# Altium PCB JacdacPowerUsbC4Port 50.PcbDoc (part 1 of 2)
Units mm, origin at the board's own origin, x right, y up, seen from the top; angles counter-clockwise.
Board outline 32.34 x 38.04 mm, 2 copper layers (Top Layer, Bottom Layer), stack 1.525 mm thick; 99 components, 54 nets, 301 pads, 83 vias.
Unrouted connection lines stored in the file: 7.
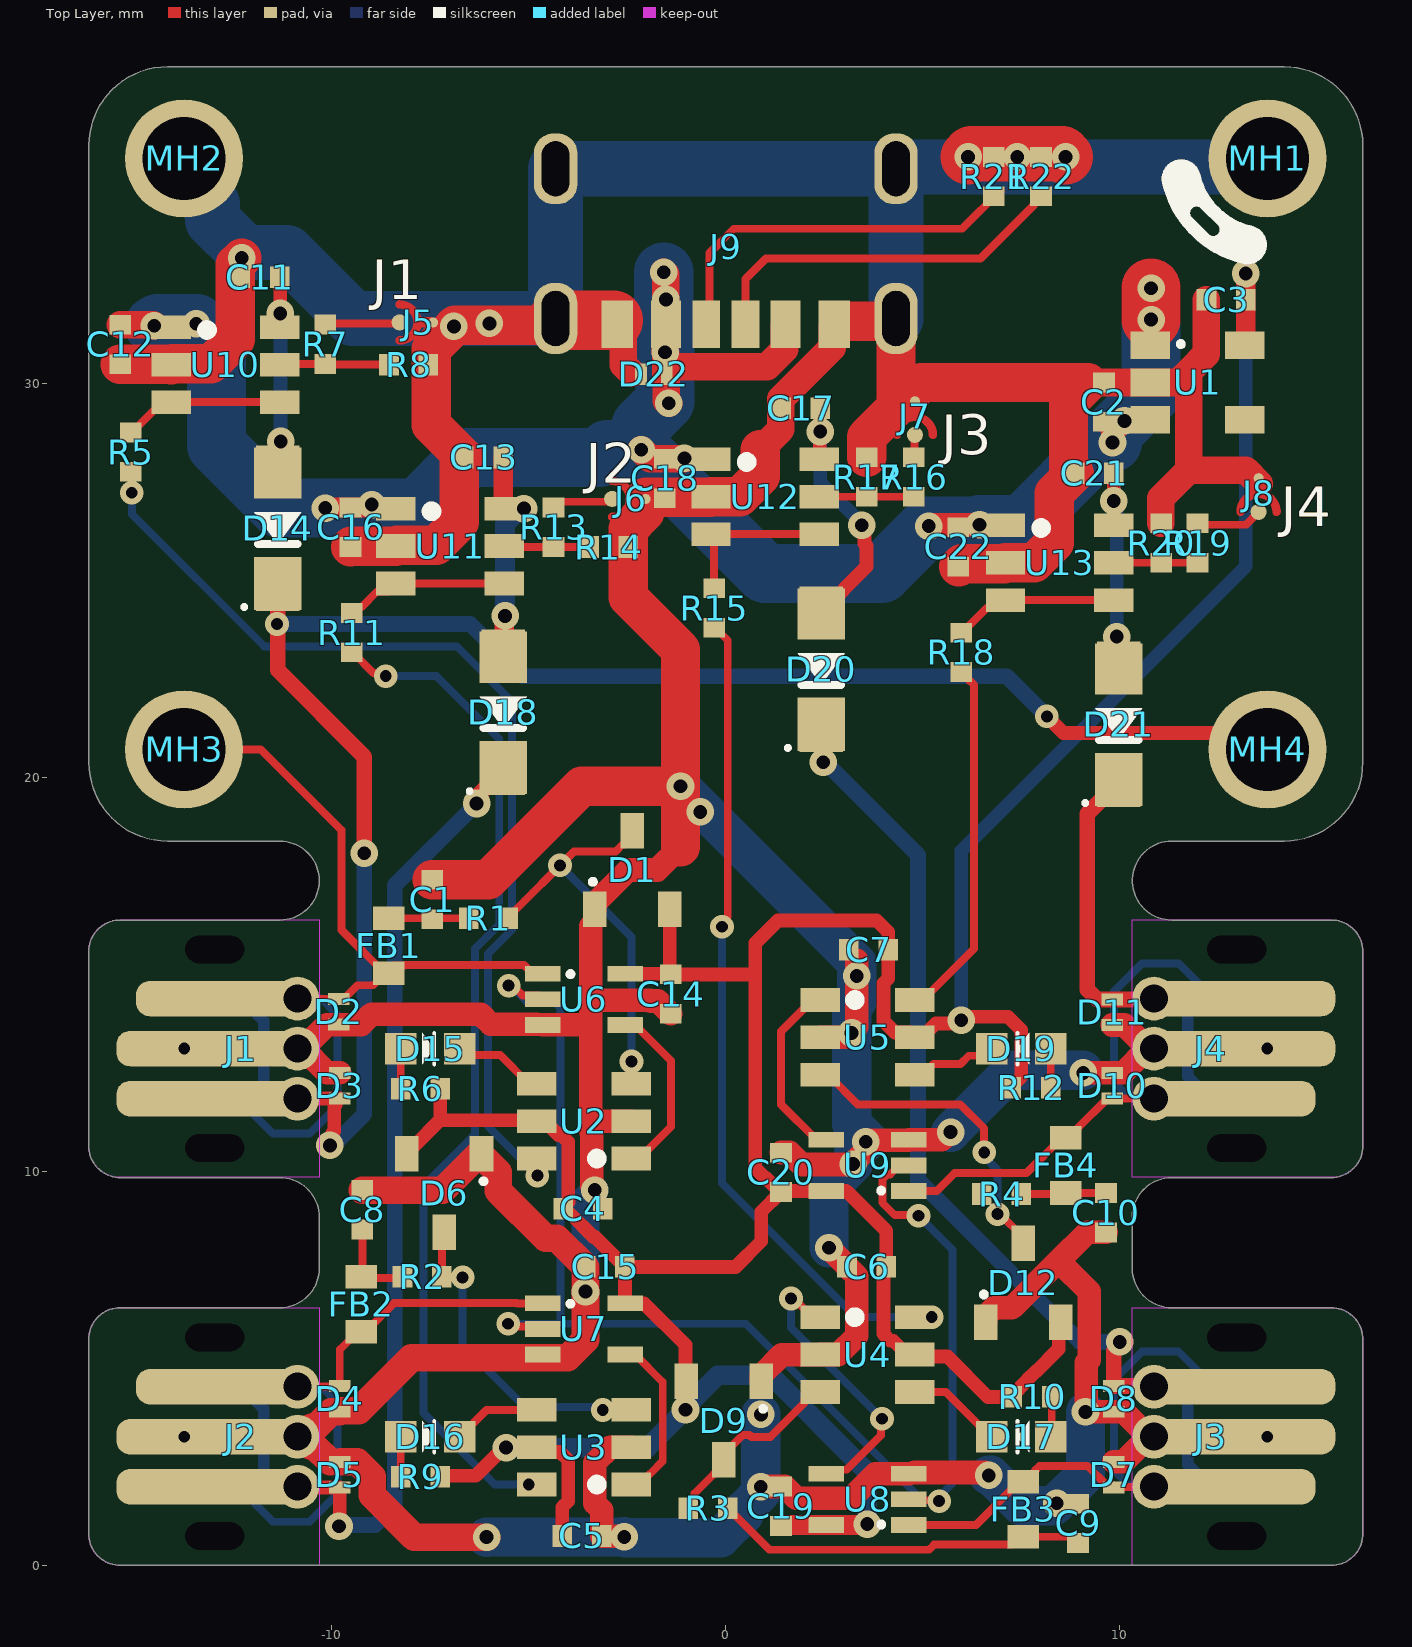
[diagram p0: Top Layer view]
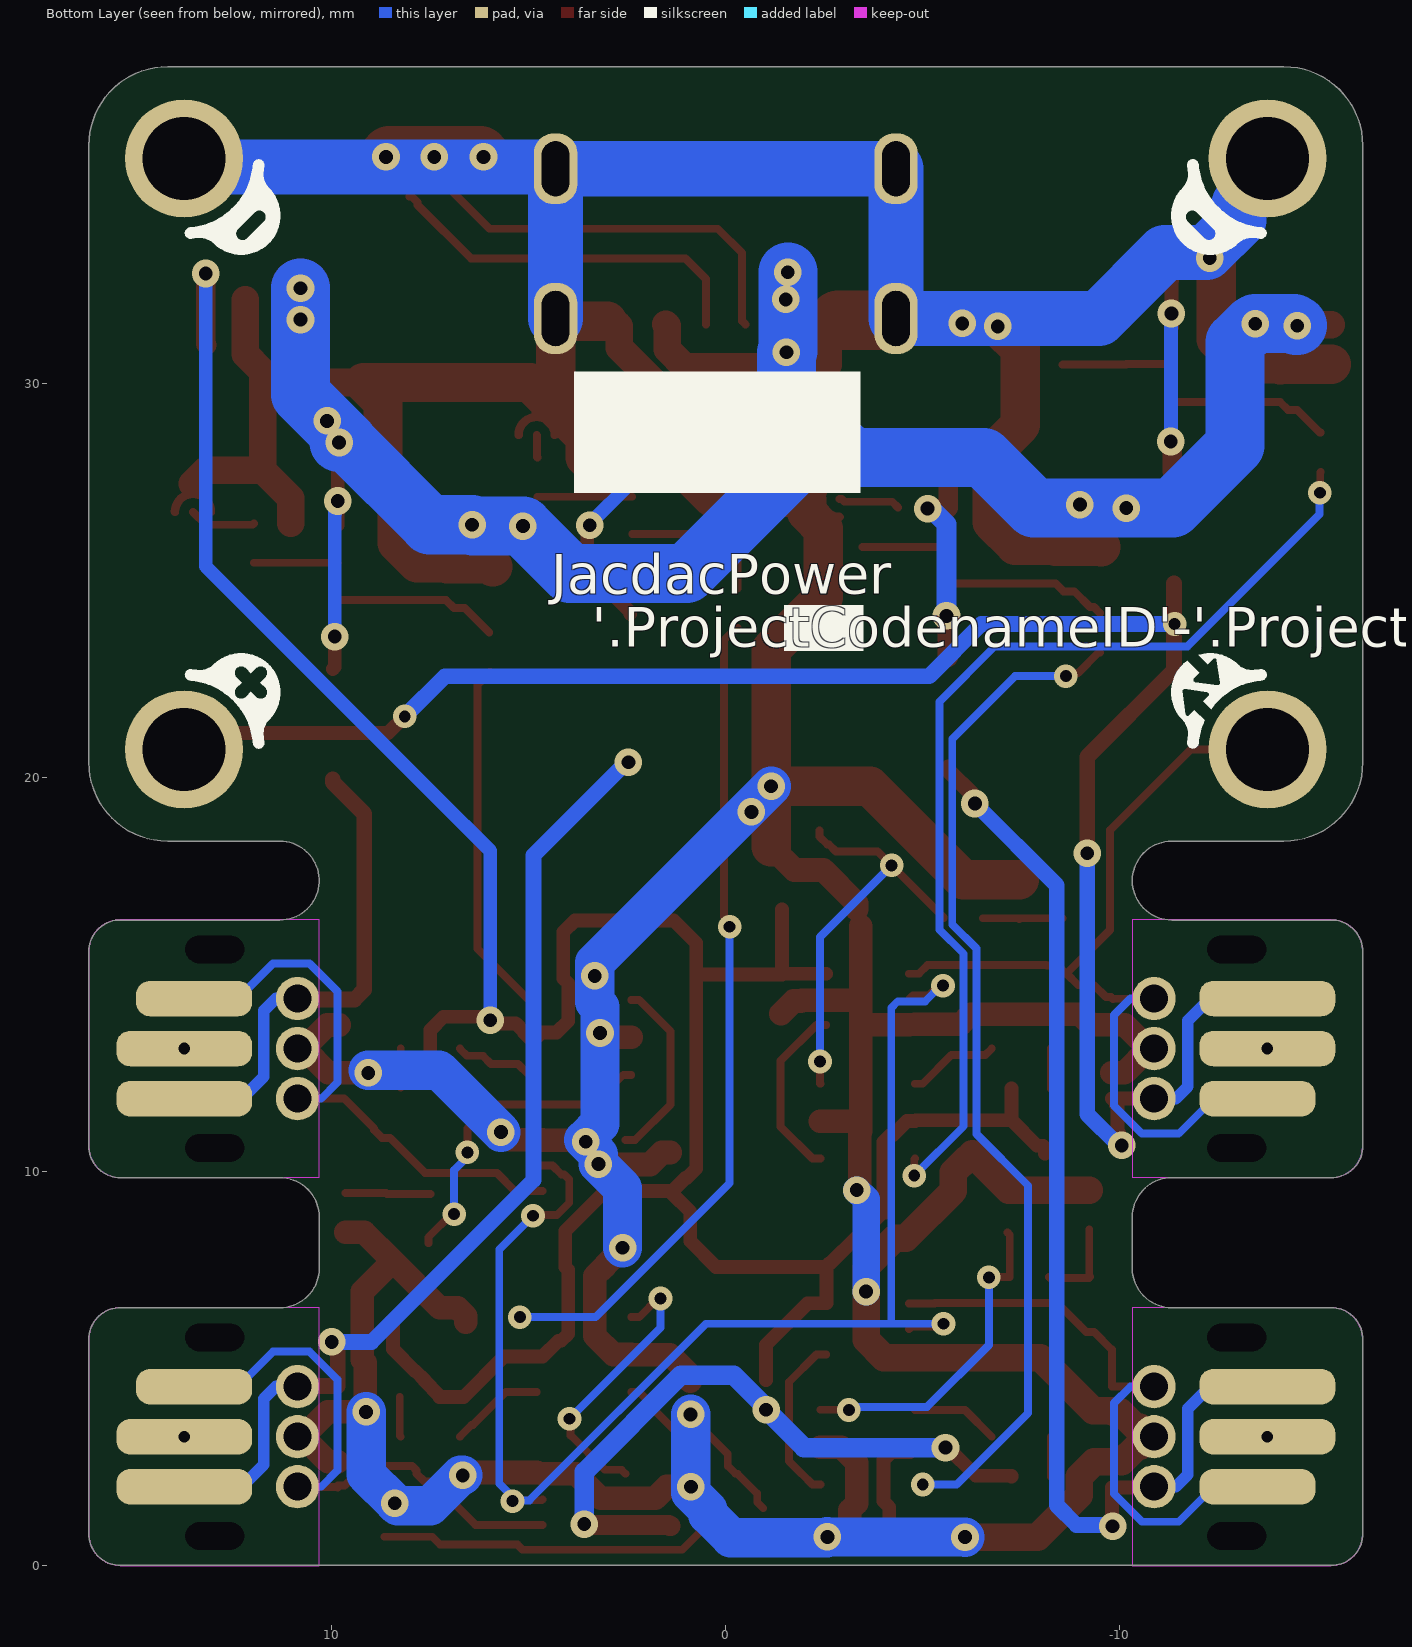
[diagram p1: Bottom Layer view, seen from below]

## Layer stack, top to bottom
Top Solder: solder mask 0.0102, Solder Resist, Dk 3.5
Top Layer: signal copper 0.0356
Dielectric 1: core 1.454, FR-4, Dk 4.2
Bottom Layer: signal copper 0.0356
Bottom Solder: solder mask 0.0102, Solder Resist, Dk 3.5

## Board outline
-16.17,0.8 ccw(c-15.371,0.799) -15.369,0 15.369,0 ccw(c15.371,0.799) 16.17,0.8 16.17,5.74 ccw(c15.371,5.741) 15.369,6.54 11.319,6.54 cw(c11.32,7.54) 10.319,7.541 10.319,8.84 cw(c11.319,8.84) 11.319,9.84 15.369,9.84 ccw(c15.371,10.639) 16.17,10.64 16.17,15.58 ccw(c15.371,15.581) 15.369,16.38 11.319,16.38 cw(c11.32,17.381) 11.321,18.381 14.17,18.381 ccw(c14.169,20.382) 16.17,20.381 16.17,36.04 ccw(c14.17,36.04) 14.17,38.04 -14.169,38.04 ccw(c-14.169,36.04) -16.168,36.04 -16.168,20.381 ccw(c-14.168,20.382) -14.169,18.381 -11.319,18.381 cw(c-11.32,17.38) -11.319,16.38 -15.369,16.38 ccw(c-15.371,15.581) -16.17,15.58 -16.17,10.64 ccw(c-15.371,10.639) -15.369,9.84 -11.319,9.84 cw(c-11.319,8.84) -10.319,8.84 -10.319,7.541 cw(c-11.32,7.54) -11.319,6.54 -15.369,6.54 ccw(c-15.371,5.741) -16.17,5.74

## Design rules (kind name [scope] priority, off if disabled: settings)
AssemblyTestPointUsage [All] p1: valid=2
BoardOutlineClearance [All] p1: gap=0.3 ignorepadtopadclearanceinfootprint=FALSE except(0: Arc-SplitContinuation Track-SplitContinuation SMDPad-SplitContinuation THPad-SplitContinuation Via-SplitContinuation Fill-SplitContinuation Poly-SplitContinuation Region-OutlineEdge Region-SplitContinuation Text-OutlineEdge Text-SplitContinuation; 0.2: Track-OutlineEdge Fill-CavityEdge Fill-CutoutEdge Fill-SplitBarrior Poly-CavityEdge Poly-CutoutEdge Poly-SplitBarrior Text-CavityEdge Text-CutoutEdge Text-SplitBarrior; 0.25: SMDPad-OutlineEdge)
Clearance [All] p1: gap=0.125 ignorepadtopadclearanceinfootprint=FALSE except(0: Arc-Hole Track-Hole SMDPad-Hole THPad-Hole Via-Hole Fill-Hole Poly-Hole Region-Hole Text-Hole)
ComponentClearance [All] p1: gap=0.1 collisioncheckmode=3 verticalgap=0.254 showdistances=FALSE
DiffPairsRouting [All] p1: maxlimit=2 minlimit=0.15 mostfreqgap=0.15 toplayer_minwidth=0.15 toplayer_maxwidth=2 toplayer_prefwidth=0.15 bottomlayer_minwidth=0.15 bottomlayer_maxwidth=2 bottomlayer_prefwidth=0.15 substack1={CB9D278B-8BF5-444A-AAF4-837A2A9DF42D} toplayer_{cb9d278b-8bf5-444a-aaf4-837a2a9df42d}_minwidth=0.381 toplayer_{cb9d278b-8bf5-444a-aaf4-837a2a9df42d}_maxwidth=0.381 toplayer_{cb9d278b-8bf5-444a-aaf4-837a2a9df42d}_prefwidth=0.381 bottomlayer_{cb9d278b-8bf5-444a-aaf4-837a2a9df42d}_minwidth=0.381 bottomlayer_{cb9d278b-8bf5-444a-aaf4-837a2a9df42d}_maxwidth=0.381 bottomlayer_{cb9d278b-8bf5-444a-aaf4-837a2a9df42d}_prefwidth=0.381 substack2={826B8647-A721-4255-895A-19F9591B9CD1} toplayer_{826b8647-a721-4255-895a-19f9591b9cd1}_minwidth=0.381 toplayer_{826b8647-a721-4255-895a-19f9591b9cd1}_maxwidth=0.381 toplayer_{826b8647-a721-4255-895a-19f9591b9cd1}_prefwidth=0.381 bottomlayer_{826b8647-a721-4255-895a-19f9591b9cd1}_minwidth=0.381 bottomlayer_{826b8647-a721-4255-895a-19f9591b9cd1}_maxwidth=0.381 bottomlayer_{826b8647-a721-4255-895a-19f9591b9cd1}_prefwidth=0.381 substack3={E64FCAF4-1BC8-437D-B1E0-0E5F2DC0F59E} toplayer_{e64fcaf4-1bc8-437d-b1e0-0e5f2dc0f59e}_minwidth=0.381 toplayer_{e64fcaf4-1bc8-437d-b1e0-0e5f2dc0f59e}_maxwidth=0.381 toplayer_{e64fcaf4-1bc8-437d-b1e0-0e5f2dc0f59e}_prefwidth=0.381 bottomlayer_{e64fcaf4-1bc8-437d-b1e0-0e5f2dc0f59e}_minwidth=0.381 bottomlayer_{e64fcaf4-1bc8-437d-b1e0-0e5f2dc0f59e}_maxwidth=0.381 bottomlayer_{e64fcaf4-1bc8-437d-b1e0-0e5f2dc0f59e}_prefwidth=0.381 substack4={E61CE66C-507C-4E1E-8E83-C905434AFC1C} toplayer_{e61ce66c-507c-4e1e-8e83-c905434afc1c}_minwidth=0.381 toplayer_{e61ce66c-507c-4e1e-8e83-c905434afc1c}_maxwidth=0.381 toplayer_{e61ce66c-507c-4e1e-8e83-c905434afc1c}_prefwidth=0.381 bottomlayer_{e61ce66c-507c-4e1e-8e83-c905434afc1c}_minwidth=0.381 bottomlayer_{e61ce66c-507c-4e1e-8e83-c905434afc1c}_maxwidth=0.381 bottomlayer_{e61ce66c-507c-4e1e-8e83-c905434afc1c}_prefwidth=0.381 maxuncoupledlength=25
FabricationTestPointUsage [All] p1: valid=2 allowmultiple=FALSE
HoleSize [All] p1: absolutevalues=TRUE maxlimit=2.54 minlimit=0.2 maxpercent=80.000 minpercent=20.000
MinimumSolderMaskSliver [All] p1: minsoldermaskwidth=0.005
PlaneClearance [All] p1: clearance=0.3
PlaneConnect [All] p1: planeconnectstyle=Relief reliefexpansion=0.5 reliefentries=4 reliefconductorwidth=0.2 reliefairgap=0.3
PolygonConnect "PolygonConnect GND" [isVIA] p1: connectstyle=Relief reliefconductorwidth=0.2 reliefentries=4 polygonreliefangle="90 Angle" airgapwidth=0.2
PolygonConnect [All] p2: connectstyle=Relief reliefconductorwidth=0.2 reliefentries=4 polygonreliefangle="90 Angle" airgapwidth=0.2
RoutingVias [All] p1: holewidth=0.3 width=0.6 viastyle="Through Hole" minholewidth=0.3 minwidth=0.6 maxholewidth=0.5 maxwidth=0.8
SilkToSilkClearance [All] p1: silktosilkclearance=0.001
SilkToSolderMaskClearance [IsPad] p1: minsilkscreentomaskgap=0.05 clearancetoexposedcopper=TRUE
SolderMaskExpansion [All] p1: expansion=0.075 istentingtop=FALSE
Width [All] p1: maxlimit=2 minlimit=0.15 preferedwidth=0.15 substack1={CB9D278B-8BF5-444A-AAF4-837A2A9DF42D} substack2={826B8647-A721-4255-895A-19F9591B9CD1} substack3={E64FCAF4-1BC8-437D-B1E0-0E5F2DC0F59E} substack4={E61CE66C-507C-4E1E-8E83-C905434AFC1C} minimp=50.000000 maximp=50.000000 favimp=50.000000
20 further rules are at their usual default settings.

## Components (designator, comment, footprint, x,y, rotation, side; value= is the part's Value field where it differs from the comment)
C1 "CL05C330JB5NNNC" "C0402_0.55MM - without outline" -7.45,16.9 r270 top
C2 "CL05A105KP5NNNC" "C0402_0.55MM - without outline" 9.6,29.525 r270 top
C3 "CL05A105KP5NNNC" "C0402_0.55MM - without outline" 12.7,32.125 r0 top
C4 "CL05A105KP5NNNC" "C0402_0.55MM - without outline" -3.625,9.05 r180 top
C5 "CL05A105KP5NNNC" "C0402_0.55MM - without outline" -3.65,0.745 r180 top
C6 "CL05A105KP5NNNC" "C0402_0.55MM - without outline" 3.575,7.575 r0 top
C7 "CL05A105KP5NNNC" "C0402_0.55MM - without outline" 3.625,15.625 r0 top
C8 "CL05C330JB5NNNC" "C0402_0.55MM - without outline" -9.225,9.025 r270 top
C9 "CL05C330JB5NNNC" "C0402_0.55MM - without outline" 8.942,1.065 r270 top
C10 "CL05C330JB5NNNC" "C0402_0.55MM - without outline" 9.65,8.95 r90 top
C11 "CL05A475MP5NRNC" "R0402 - WITHOUT OUTLINE" -11.825,32.7 r0 top
C12 "CL05A475MP5NRNC" "R0402 - WITHOUT OUTLINE" -15.371,30.991 r90 top
C13 "CL05A475MP5NRNC" "R0402 - WITHOUT OUTLINE" -6.15,28.123 r0 top
C14 "CL05A105KP5NNNC" "C0402_0.55MM - without outline" -1.4,14.5 r90 top
C15 "CL05A105KP5NNNC" "C0402_0.55MM - without outline" -3.062,7.575 r0 top
C16 "CL05A475MP5NRNC" "R0402 - WITHOUT OUTLINE" -9.525,26.35 r90 top
C17 "CL05A475MP5NRNC" "R0402 - WITHOUT OUTLINE" 1.9,29.375 r0 top
C18 "CL05A475MP5NRNC" "R0402 - WITHOUT OUTLINE" -1.55,27.59 r90 top
C19 "CL05A105KP5NNNC" "C0402_0.55MM - without outline" 1.4,1.5 r270 top
C20 "CL05A105KP5NNNC" "C0402_0.55MM - without outline" 1.4,9.975 r270 top
C21 "CL05A475MP5NRNC" "R0402 - WITHOUT OUTLINE" 9.35,27.725 r0 top
C22 "CL05A475MP5NRNC" "R0402 - WITHOUT OUTLINE" 5.9,25.85 r90 top
D1 "BAT54S" "NXP-BAT54S-TO-236AB - without outline" -2.375,17.65 r90 top
D2 "RCLAMP0521P-N" "TVS 0402 - without outline" -9.825,14.05 r270 top
D3 "RCLAMP0521P-N" "TVS 0402 - without outline" -9.8,12.175 r90 top
D4 "RCLAMP0521P-N" "TVS 0402 - without outline" -9.8,4.225 r270 top
D5 "RCLAMP0521P-N" "TVS 0402 - without outline" -9.8,2.3 r90 top
D6 "BAT54S" "NXP-BAT54S-TO-236AB - without outline" -7.15,9.45 r270 top
D7 "RCLAMP0521P-N" "TVS 0402 - without outline" 9.85,2.3 r90 top
D8 "RCLAMP0521P-N" "TVS 0402 - without outline" 9.85,4.225 r270 top
D9 "BAT54S" "NXP-BAT54S-TO-236AB - without outline" -0.05,3.675 r270 top
D10 "RCLAMP0521P-N" "TVS 0402 - without outline" 9.812,12.175 r90 top
D11 "RCLAMP0521P-N" "TVS 0402 - without outline" 9.812,14.04 r270 top
D12 "BAT54S" "NXP-BAT54S-TO-236AB - without outline" 7.55,7.175 r90 top
D14 "RB161MM-20TR" SOD-123F -11.375,26.325 r90 top
D14 "PMEG2010ER,115" SOD-123W -11.375,26.325 r90 top
D15 "Everlight Elec'''" "0603 ORANGE" -7.5,13.116 r180 top
D16 "Everlight Elec'''" "0603 Orange" -7.5,3.265 r180 top
D17 "Everlight Elec'''" "0603 Orange" 7.5,3.265 r0 top
D18 "RB161MM-20TR" SOD-123F -5.65,21.65 r90 top
D18 "PMEG2010ER,115" SOD-123W -5.65,21.65 r90 top
D19 "Everlight Elec'''" "0603 Orange" 7.5,13.116 r0 top
D20 "RB161MM-20TR" SOD-123F 2.425,22.75 r90 top
D20 "PMEG2010ER,115" SOD-123W 2.425,22.75 r90 top
D21 "RB161MM-20TR" SOD-123F 9.975,21.35 r90 top
D21 "PMEG2010ER,115" SOD-123W 9.975,21.35 r90 top
D22 "RCLAMP0521P-N" "TVS 0402 - without outline" -1.825,30.234 r180 top
FB1 "TDK MPZ1608S102ATA00" "TDK MPZ1608 0.8mm - without outline" -8.55,15.725 r90 top
FB2 "TDK MPZ1608S102ATA00" "TDK MPZ1608 0.8mm - without outline" -9.25,6.625 r90 top
FB3 "TDK MPZ1608S102ATA00" "TDK MPZ1608 0.8mm - without outline" 7.55,1.425 r270 top
FB4 "TDK MPZ1608S102ATA00" "TDK MPZ1608 0.8mm - without outline" 8.625,10.15 r270 top
J1 "3 pin JACDAC edge connector" JACDAC_EDGE_CONNECTOR_0.15mm_T&G -10.871,13.116 r90 top locked
J2 "3 pin JACDAC edge connector" JACDAC_EDGE_CONNECTOR_0.15mm_T&G -10.871,3.265 r90 top locked
J3 "3 pin JACDAC edge connector" JACDAC_EDGE_CONNECTOR_0.15mm_T&G 10.871,3.265 r270 top locked
J4 "3 pin JACDAC edge connector" JACDAC_EDGE_CONNECTOR_0.15mm_T&G 10.871,13.116 r270 top locked
J5 "OpenSolderBlob" SolderBlobA -7.9,31.55 r180 top
J6 "OpenSolderBlob" SolderBlobA -2.506,27.069 r180 top
J7 "OpenSolderBlob" SolderBlobA 4.8,29.075 r270 top
J8 "OpenSolderBlob" SolderBlobA 13.525,27.122 r270 top
J9 "TYPE-C-31-M-17" TYPE-C-31-M-17 0,31.5 r180 top
MH1 "MH_5.0MMK_3.0MMC_2.1MMD_PTH" MH_5.0MMK_3.0MMC_2.1MMD_PTH 13.75,35.711 r0 top locked
MH2 "MH_5.0MMK_3.0MMC_2.1MMD_PTH" MH_5.0MMK_3.0MMC_2.1MMD_PTH -13.75,35.711 r180 top locked
MH3 "MH_5.0MMK_3.0MMC_2.1MMD_PTH" MH_5.0MMK_3.0MMC_2.1MMD_PTH -13.75,20.711 r180 top locked
MH4 "MH_5.0MMK_3.0MMC_2.1MMD_PTH" MH_5.0MMK_3.0MMC_2.1MMD_PTH 13.75,20.711 r0 top locked
R1 "RC0402FR-07220RL" "R0402 - WITHOUT OUTLINE" -6.025,16.425 r180 top
R2 "RC0402FR-07220RL" "R0402 - WITHOUT OUTLINE" -7.708,7.321 r180 top
R3 "RC0402FR-07220RL" "R0402 - WITHOUT OUTLINE" -0.45,1.45 r0 top
R4 "RC0402FR-07220RL" "R0402 - WITHOUT OUTLINE" 7,9.425 r0 top
R5 "RC0402FR-07220RL" "R0402 - WITHOUT OUTLINE" -15.102,28.255 r270 top
R6 "RC0402FR-071KL" "R0402 - WITHOUT OUTLINE" -7.75,12.1 r0 top
R7 "RC0402FR-0760K4L" "R0402 - WITHOUT OUTLINE" -10.168,30.994 r270 top
R8 "RC0402FR-0760K4L" "R0402 - WITHOUT OUTLINE" -8.05,30.475 r180 top
R9 "RC0402FR-071KL" "R0402 - WITHOUT OUTLINE" -7.75,2.25 r0 top
R10 "RC0402FR-071KL" "R0402 - WITHOUT OUTLINE" 7.775,4.275 r180 top
R11 "RC0402FR-07220RL" "R0402 - WITHOUT OUTLINE" -9.495,23.675 r270 top
R12 "RC0402FR-071KL" "R0402 - WITHOUT OUTLINE" 7.75,12.125 r180 top
R13 "RC0402FR-0760K4L" "R0402 - WITHOUT OUTLINE" -4.373,26.35 r270 top
R14 "RC0402FR-0760K4L" "R0402 - WITHOUT OUTLINE" -2.974,25.848 r180 top
R15 "RC0402FR-07220RL" "R0402 - WITHOUT OUTLINE" -0.295,24.3 r270 top
R16 "RC0402FR-0760K4L" "R0402 - WITHOUT OUTLINE" 4.775,27.625 r270 top
R17 "RC0402FR-0760K4L" "R0402 - WITHOUT OUTLINE" 3.575,27.625 r270 top
R18 "RC0402FR-07220RL" "R0402 - WITHOUT OUTLINE" 5.975,23.175 r270 top
R19 "RC0402FR-0760K4L" "R0402 - WITHOUT OUTLINE" 11.975,25.95 r270 top
R20 "RC0402FR-0760K4L" "R0402 - WITHOUT OUTLINE" 11.05,25.95 r270 top
R21 "RC0402JR-075K1L" "R0402 - WITHOUT OUTLINE" 6.8,35.25 r90 top
R22 "RC0402JR-075K1L" "R0402 - WITHOUT OUTLINE" 8,35.25 r90 top
U1 "LDO 3.3V/300 mA" "ON_SEMI-SOT23-5 - without outline" 11.975,30.025 r0 top
U2 "PMS150C" SOT23-6 -3.6,11.275 r180 top
U3 "PMS150C" SOT23-6 -3.6,3 r180 top
U4 "PMS150C" SOT23-6 3.6,5.35 r0 top
U5 "PMS150C" SOT23-6 3.6,13.4 r0 top
U6 "74LVC1G66GW,125" TSSOP-5/SOT353-1 -3.6,14.367 r0 top
U7 "74LVC1G66GW,125" TSSOP-5/SOT353-1 -3.6,6 r0 top
U8 "74LVC1G66GW,125" TSSOP-5/SOT353-1 3.6,1.675 r180 top
U9 "74LVC1G66GW,125" TSSOP-5/SOT353-1 3.6,10.15 r180 top
U10 "TPS2553DBVR" "TI-TPS2553 - without_outline" -12.7,30.475 r0 top
U11 "TPS2553DBVR" "TI-TPS2553 - without_outline" -7,25.873 r0 top
U12 "TPS2553DBVR" "TI-TPS2553 - without_outline" 1,27.125 r0 top
U13 "TPS2553DBVR" "TI-TPS2553 - without_outline" 8.475,25.45 r0 top

## Footprints (in the part's own frame and the unit in brackets; to place one, negate y for a bottom-side part, rotate by r counter-clockwise, add the part's x,y. Pads: shape width x height; smd on the part's side, far side on the other; paste and mask are expansions set on the pad)
"0603 ORANGE" [mm]
  rect 0.8x0.8 smd paste-0.05: 1(-0.75,0) 2(0.75,0)
  silkscreen extent -0.1,-0.4 0.2,0.4, body extent -0.79,-0.4 0.81,0.4, height 0.4
"0603 Orange" [mm]
  rect 0.8x0.8 smd paste-0.05: 1(-0.75,0) 2(0.75,0)
  silkscreen extent -0.1,-0.4 0.2,0.4, body extent -0.79,-0.4 0.81,0.4, height 0.4
"C0402_0.55MM - without outline" [mm]
  rect 0.5x0.55 smd: 1(-0.5,0) 2(0.5,0)
  body extent -0.5,-0.25 0.5,0.25, height 0.55
JACDAC_EDGE_CONNECTOR_0.15mm_T&G [mm] "JacDac 3 pin connector with traces for 0.15mm T&G"
  rrect78% 0.9x2.95 smd far side paste-1 mask+0: 1(-1.27,2.625)
  rrect78% 0.9x4.3 smd paste-1 mask+0: 1(1.27,1.95)
  round 1.11 / inner round 0.71 / far side round 1.1 hole 0.71 paste-0.254 mask+0: 1(1.27,0) 2(0,0) 3(-1.27,0)
  rrect78% 0.9x3.45 smd far side paste-1 mask+0: 2(0,2.875) 3(1.27,2.875)
  rrect78% 0.9x4.8 smd paste-1 mask+0: 2(0,2.2) 3(-1.27,2.2)
  round 0 hole 0.7 slot 1.5 at 90 deg unplated: ""(-2.52,2.1) ""(2.52,2.1)
  Top Layer keep-out region: -3.27,-0.55 -3.27,4.5 -3.209,4.806 -3.036,5.066 -2.776,5.239 -2.47,5.3 -2.47,5.3 2.47,5.3 2.776,5.239 3.036,5.066 3.209,4.806 3.27,4.5 3.27,4.5 3.27,-0.55
  Bottom Layer lines w0.2: -1.27,2.625 -1.27,1.513 -2.159,0.624 -2.159,-0.305 -1.448,-1.016 0.254,-1.016 0.854,-1.016 1.27,-0.6 1.27,0
  Bottom Layer lines w0.3: 1.27,2.875 1.27,1.412 0.713,0.855 -0.965,0.855 -1.27,0.55 -1.27,0
  Bottom Layer keep-out region: -3.27,-0.55 -3.27,4.5 -3.209,4.806 -3.036,5.066 -2.776,5.239 -2.47,5.3 -2.47,5.3 2.47,5.3 2.776,5.239 3.036,5.066 3.209,4.806 3.27,4.5 3.27,4.5 3.27,-0.55
MH_5.0MMK_3.0MMC_2.1MMD_PTH [mm] "Mounting Hole 5.0mm clearance, 3.1 annualar ring and 2.1mm PTH"
  round 3 hole 2.1 mask+0.05: 1(0,0)
"NXP-BAT54S-TO-236AB - without outline" [mm] "SOT23, 3-Leads, Body 2.90x2.30mm, Pitch 0.95mm, IPC Medium Density"
  rect 0.9x0.6 smd: 1(-1,0.95) 2(-1,-0.95) 3(1,0)
  silkscreen extent -0.35,0.95 -0.25,1.05, body extent -1.32,-1.5 1.32,1.5, height 1.12
"ON_SEMI-SOT23-5 - without outline" [mm]
  rect 1x0.7 smd: 1(-1.2,0.95) 2(-1.2,0) 3(-1.2,-0.95) 4(1.2,-0.95) 5(1.2,0.95)
  silkscreen extent -0.47,0.93 -0.38,1.02, body extent -1.5,-1.57 1.5,1.58, height 1.1
"R0402 - WITHOUT OUTLINE" [mm]
  rect 0.5x0.55 smd: 1(-0.5,0) 2(0.5,0)
  body extent -0.5,-0.25 0.5,0.25, height 0.35
SOD-123F [mm] "SODFL, 2-Leads, Body 1.65x3.60mm, IPC Medium Density"
  rect 1.35x1.1 smd: 1(-1.425,0) 2(1.425,0)
  silkscreen extent -2.05,0.8 -1.95,0.9, body extent -1.73,-0.82 1.72,0.82, height 0.95
SOD-123W [mm]
  rect 1.35x1.2 smd: 1(-1.4,0)
  rect 1.3x1.2 smd: 2(1.4,0)
  silkscreen extent -0.4,-0.6 0.4,0.6, body extent -1.85,-0.95 1.85,0.95, height 1.09
SolderBlobA [mil] "open solder blob, 'ball and socket' style"
  round 16 smd paste-10: 1(15,0)
  round 1 smd paste-10 mask-1: 2(-22.01,0) 2(-18.47,-3.55) 2(-18.47,3.55)
  oval 10x10.01 smd paste-10 mask-2: 2(-18.65,0.03)
  Top Layer region: -17,-3.84 -18.47,-3.55 -19.72,-2.72 -20.55,-1.47 -20.84,0 -20.84,0 -20.55,1.47 -19.72,2.72 -18.47,3.55 -17,3.84 -17,3.84 -15.53,3.55 -14.28,2.72 -13.45,1.47 -13.16,0 -13.16,0 -13.45,-1.47 -14.28,-2.72 -15.53,-3.55 -17,-3.84
  Top Layer region: -17,-5.01 -19.18,-4.52 -20.92,-3.13 -21.89,-1.12 -21.89,1.12 -20.92,3.13 -19.18,4.52 -17,5.01 -17,5.01 -6.44,5.01 -2.16,13.79 5.48,19.85 15,22.01 15,22.01 16.54,21.71 17.84,20.84 18.71,19.54 19.02,18 19.02,18 18.71,16.46 17.84,15.16 16.54,14.29 15,13.99 15,13.99 9.65,12.92 5.11,9.89 2.08,5.35 1.02,0 1.02,0 2.08,-5.35 5.11,-9.89 9.65,-12.92 15,-13.99 15,-13.99 16.54,-14.29 17.84,-15.16 18.71,-16.46 19.02,-18 19.02,-18 18.71,-19.54 17.84,-20.84 16.54,-21.71 15,-22.01 15,-22.01 5.48,-19.85 -2.16,-13.79 -6.44,-5.02 -6.44,-5.01
SOT23-6 [mm] "SOT23, 6-Leads, Body 2.90x2.45mm, Pitch 0.95mm, IPC Medium Density"
  rect 1x0.6 smd: 1(-1.2,0.95) 2(-1.2,0) 3(-1.2,-0.95) 4(1.2,-0.95) 5(1.2,0) 6(1.2,0.95)
  silkscreen extent -0.43,0.85 -0.23,1.05, body extent -1.4,-1.45 1.4,1.45, height 1.45
"TDK MPZ1608 0.8mm - without outline" [mm]
  rect 0.6x0.8 smd paste-0.1: 1(-0.7,0) 2(0.7,0)
  body extent -0.8,-0.4 0.8,0.4, height 0.8
"TI-TPS2553 - without_outline" [mm] "SOT23, 6-Leads, Body 2.90x2.80mm, Pitch 0.95mm, IPC Medium Density"
  rect 1x0.6 smd: 1(-1.375,0.95) 2(-1.375,0) 3(-1.375,-0.95) 4(1.375,-0.95) 5(1.375,0) 6(1.375,0.95)
  silkscreen extent -0.59,0.76 -0.34,1.01, body extent -1.52,-1.52 1.53,1.53, height 1.1
TSSOP-5/SOT353-1 [mm] "plastic thin shrink small outline package; 5 leads; body width 1.25 mm"
  rect 0.9x0.4 smd: 1(-1.05,0.65) 2(-1.05,0) 3(-1.05,-0.65) 4(1.05,-0.65) 5(1.05,0.65)
  silkscreen extent -0.39,0.59 -0.29,0.69, body extent -1.05,-1.05 1.05,1.05, height 0.93
"TVS 0402 - without outline" [mm] "TVS 0402 RoHS"
  rect 0.3x0.55 smd mask+0.05: 1(-0.325,0) 2(0.325,0)
  body extent -0.5,-0.3 0.5,0.3, height 0.5
TYPE-C-31-M-17 [mm] "USB - Type C Female 6 USB Connectors RoHS"
  rrect90% 1.1x1.8 hole 0.7 slot 1.4 at 90 deg: 1(-4.32,-0.15) 2(-4.32,-3.95) 3(4.32,-3.95) 4(4.32,-0.15)
  rect 0.7x1.2 smd: A5(-0.5,0) B5(0.5,0)
  rect 0.76x1.2 smd: A9(1.52,0) B9(-1.52,0)
  rect 0.8x1.2 smd: A12(2.75,0) B12(-2.75,0)
  body extent -4.45,-6.8 4.5,0.6, height 3.16

## Part data
C1 C8 C9 C10: "CAP CER 33PF 50V C0G/NP0 0402", Capacitance=33pF, Case Code (Imperial)=0402, Case Code (Metric)=1005, Dielectric=C0G, Manufacturer=Samsung, Max Operating Temperature=125°C, Min Operating Temperature=-55°C, Package Quantity=1, Supplier Part Number 1=1276-1272-1-ND, Temperature Coefficient=300ppm/°C, Tolerance=5%, Voltage=50V, Case/Package=0402, Category="Ceramic Capacitors", ComponentLink1Description="Online datasheet", ComponentLink1URL=https://datasheet.ciiva.com/15195/getdatasheetpartid-355282-15195687.pdf, Construction=Flat, Contact Plating=Tin, Depth=0.5mm, Height=0.5mm, Lead Free="Lead Free", Length=1mm, Manufacturer Part Number=CL05C330JB5NNNC, Material=Ceramic, Mount="Surface Mount", Packaging="Tape and Reel", Pricing 1="1=0.10000, 10=0.02300, 50=0.01260, 100=0.01040, 500=0.00740, 1000=0.00582, 2500=0.00529, 5000=0.00487 (USD)", Pricing 2="1=0.12500, 25=0.02900, 100=0.01300, 250=0.01100, 500=0.00900, 1000=0.00600 (USD)", Pricing 3="1=0.10000, 10=0.01400, 50=0.01400, 100=0.01100, 1000=0.00600, 10000=0.00400 (USD)", Pricing 4="150=0.01120, 500=0.00860, 2500=0.00640, 5000=0.00550 (GBP)", Radiation Hardening=No, RoHS=Yes, RoHS Compliant=Yes, Series=CL, Stock 1=5436088, Stock 2=45340, Stock 3=8877, Stock 4=10934, Supplier 1=Digi-Key, Supplier 2=Newark, Supplier 3=Mouser, Supplier 4=Farnell, Supplier Part Number 2=82AC9259, Supplier Part Number 3=187-CL05C330JB5NNNC, Supplier Part Number 4=3013373RL, Thickness=0.022inch, Voltage Rating=50V, Voltage Rating (DC)=50V, Width=0.02inch
C2 C3 C4 C5 C6 C7 C14 C15 C19 C20: "CAP CER 1UF 10V X5R 0402", Capacitance=1µF, Case Code (Imperial)=0402, Case Code (Metric)=1005, Dielectric=X5R, Manufacturer=Samsung, Max Operating Temperature=85°C, Min Operating Temperature=-55°C, Package Quantity=1, Supplier Part Number 1=1276-1076-1-ND, Tolerance=10%, Voltage Rating=10V, Case/Package=0402, Category=Capacitors, Checked=?, ComponentLink1Description="Online datasheet", ComponentLink1URL=https://datasheet.ciiva.com/15195/getdatasheetpartid-358390-15195630.pdf, Contact Plating=Tin, Created=DG, Depth=0.5mm, Height=0.5mm, Length=1mm, Manufacturer Part Number=CL05A105KP5NNNC, Material=Ceramic, Mount="Surface Mount", Packaging="Tape and Reel", Pricing 1="1=0.10000, 10=0.03900, 50=0.02100, 100=0.01720, 500=0.01228, 1000=0.00965, 2500=0.00877, 5000=0.00807 (USD)", Pricing 2="1=0.10000, 10=0.04200, 100=0.01800, 500=0.01300, 1000=0.01000, 2500=0.00900 (USD)", Pricing 3="10=0.02450, 100=0.02000, 500=0.01310, 2500=0.00920, 5000=0.00810, 10000=0.00640, 50000=0.00490 (GBP)", Radiation Hardening=No, RoHS=Yes, Stock 1=5705569, Stock 2=928941, Stock 3=53670, Supplier 1=Digi-Key, Supplier 2=Mouser, Supplier 3=Farnell, Supplier Part Number 2=187-CL05A105KP5NNNC, Supplier Part Number 3=3013329, Thickness=0.022inch, Width=0.02inch
C11 C12 C13 C16 C17 C18 C21 C22: "CAP CER 4.7UF 10V X5R 0402", Capacitance=4.7uF, Case Code (Imperial)=0402, Case Code (Metric)=1005, Dielectric=X5R, Manufacturer=Samsung, Max Operating Temperature=85°C, Min Operating Temperature=-55°C, Package Quantity=10000, Supplier Part Number 1=1276-1482-2-ND, Tolerance=20%, Voltage Rating=10V, Case/Package=0402, Category="Ceramic Capacitors", Checked By=?, ComponentLink1Description="Online datasheet", ComponentLink1URL=https://datasheet.ciiva.com/25786/cl05a475mp5nrnc-25786963.pdf, Created By="D. Gakure", Lead Free="Lead Free", Length=0.039inch, Manufacturer Part Number=CL05A475MP5NRNC, Mount="Surface Mount", Packaging="Tape and Reel", Pricing 1="10000=0.01405, 20000=0.01338 (USD)", Pricing 2="1=0.23500, 500=0.03970, 1500=0.02900, 2500=0.02500, 5000=0.02050 (USD)", RoHS=Yes, RoHS Compliant=Yes, Series=CL, Stock 1=840000, Stock 2=2004, Supplier 1=Digi-Key, Supplier 2="Future Electronics", Supplier Part Number 2=2103694, Thickness=0.022inch, Width=0.02inch
D1 D6 D9 D12: "DIODE ARRAY SCHOTTKY 30V SOT23", Manufacturer=Nexperia, Manufacturer Part Number=BAT54S,235, Supplier Part Number 1=1727-1868-1-ND, Category="Rectifier Diodes", ComponentLink1Description="NXP datasheet online", ComponentLink1URL=https://assets.nexperia.com/documents/data-sheet/BAT54_SER.pdf, Pricing 1="1=0.13000, 10=0.11900, 100=0.05610, 500=0.03326, 1000=0.02185, 5000=0.02138 (USD)", RoHS=No, Stock 1=14011, Supplier 1=Digi-Key, Supplier 2=Mouser, Supplier 3=RSComponents, Supplier Part Number 2=771-BAT54S235, Supplier Part Number 3=1707990
D2 D3 D4 D5 D7 D8 D10 D11 D22: "Bidirectional 5V (Max) 6V 16V 3.5A (8/20us) 0402 TVS RoHS", Manufacturer="Born Semiconductor", Package=0402, Supplier1 Part Number=C316043, Checked By=?, ComponentLink1Description="Online datasheet", ComponentLink1URL=https://datasheet.lcsc.com/szlcsc/Bourne-Semicon-Shenzhen-RCLAMP0521P-N_C316043.pdf, Created By="D Gakure", Manufacturer Part Number=RCLAMP0521P-N, Supplier1=LCSC
D14 D18 D20 D21: "ROHM - RB161MM-20TR - Schottky-Gleichrichterdiode, 20 V, 1 A, Einfach, SOD-123FL, 2 Pin(s), 350 mV"
D14 D18 D20 D21: "NEXPERIA - PMEG2010ER,115 - DIODE, RECT SCH, 20V, 1A, SOD123W", Manufacturer=Nexperia, Supplier Part Number 1=1727-5192-1-ND, ComponentLink1Description="Online datasheet", ComponentLink1URL=http://www.farnell.com/datasheets/1383341.pdf, Manufacturer Part Number=PMEG2010ER,115, Pricing 1="1=0.42000, 10=0.31300, 100=0.19480, 500=0.13328, 1000=0.10252 (USD)", Pricing 2="3000=0.20000, 6000=0.16300, 9000=0.16200, 12000=0.16100, 15000=0.16000 (USD)", Pricing 3="50=0.32100, 100=0.26700, 250=0.21200, 500=0.11100, 1000=0.08200 (USD)", Pricing 4="1=0.37000, 10=0.25700, 50=0.25700, 100=0.13400, 1000=0.09400, 10000=0.07200 (USD)", Pricing 5="5=0.40400, 10=0.27600, 100=0.13400, 500=0.11500, 1000=0.07750 (GBP)", RoHS=Yes, RoHS Compliant=Yes, Stock 1=722, Stock 2=144000, Stock 3=1, Stock 4=2146, Stock 5=24250, Supplier 1=Digi-Key, Supplier 2="Future Electronics", Supplier 3=RSComponents, Supplier 4=Mouser, Supplier 5=Farnell, Supplier Part Number 2=4222907, Supplier Part Number 3=8166824P, Supplier Part Number 4=771-PMEG2010ER115, Supplier Part Number 5=1907681
D15 D16 D17 D19: library part 19-217/S2C-AQ1R1B/3T, "LED ORANGE DIFFUSED 0603 SMD", Case Code (Imperial)=0603, Color=Orange, Manufacturer="Everlight Elec", Supplier 1 Part Number=C146215, Case/Package=0603, Colour=Orange, ComponentLink1Description="Online datasheet", ComponentLink1URL=https://datasheet.lcsc.com/lcsc/1912171731_Everlight-Elec-19-217-S2C-AQ1R1B-3T_C146215.pdf, Manufacturer Part Number=19-217/S2C-AQ1R1B/3T, Mount="Surface Mount", Supplier 1=LCSC
FB1 FB2 FB3 FB4: "0603 1k@100MHz 0.8A chip", Case Code (Imperial)=0603, Case Code (Metric)=1608, Current Rating=800mA, DC Resistance (DCR)=300mR, Manufacturer=TDK, Manufacturer Part Number=MPZ1608S102ATA00, Package Quantity=4000, Supplier Part Number 1=445-8694-1-ND, Tolerance=25%, Case/Package=0603, ComponentLink2Description="datasheet online", ComponentLink2URL=https://www.mouser.co.uk/datasheet/2/400/eads_commercial_power_mpz1608_en-923650.pdf, ComponentLink3Description=datasheet, ComponentLink3URL="Y:\System\Altium\Libraries 2014\TDK\Datasheets\eads_commercial_power_mpz1608_en-923650.pdf", Core Material=Ferrite, Height=0.037inch, Impedance="1kR @ 100MHz", Length=0.063inch, Max DC Current=800mA, Mount="Surface Mount", Packaging="Tape and Reel", Pricing 1="1=0.1, 10=0.079, 25=0.0716, 50=0.0644, 100=0.0472, 250=0.03432, 500=0.03146, 1000=0.02717 (USD)", Stock 1=113542, Supplier 1=Digi-Key, Supplier 2=Mouser, Supplier Part Number 2=810-MPZ1608S102ATA00, Width=0.031inch
J1 J2 J3 J4: library part "Jacdac edge connector", "3 pin Jacdac edge connector 1.27mm pitch", Manufacturer Part Number=JACDAC_EDGE_CONNECTOR, Checked By=?, ComponentLink1Description="Yuliang JACDAC cable connector drawing online", ComponentLink1URL=https://github.com/microsoft/jacdac-mdk/blob/main/connector/JACDAC-Connector-by-Yuliang-2020-11-28.pdf, ComponentLink2Description="JACDAC PCB edge connector spec onlin", ComponentLink2URL=https://github.com/microsoft/jacdac-mdk/blob/main/connector/JACDAC_PCB_Edge_Connector_Drawing_JD-PEC-01_rev_01.pdf, Created By="D. Gakure", PCB Type="1.6mm FR4"
J5 J6 J7 J8: "Open solder blob"
J9: "USB - Type C Female 6 USB Connectors RoHS", Manufacturer="Korean Hroparts Elec", Supplier 1 Part Number=C283540, Category="USB Connectors", ComponentLink1Description="Online datasheet", ComponentLink1URL=https://datasheet.lcsc.com/szlcsc/1811101526_Korean-Hroparts-Elec-TYPE-C-31-M-17_C283540.pdf, Gender=Receptacle, Manufacturer Part Number=TYPE-C-31-M-17, Number of Positions=6, Orientation="Right Angle", RoHS=Yes, Supplier 1=LCSC
MH1 MH2 MH3 MH4: "Mounting Hole 5.0mm keepout, 3.0mm annualar ring and 2.1mm Drill PTH"
R1 R2 R3 R4 R5 R11 R15 R18: "RES SMD 220 OHM 1% 1/16W 0402", Case Code (Imperial)=0402, Case Code (Metric)=1005, Manufacturer=Yageo, Max Operating Temperature=155°C, Max Power Dissipation=63mW, Min Operating Temperature=-55°C, Package Quantity=1, Power Rating=62.5mW, Resistance=220R, Resistor Type="Thick Film", Supplier Part Number 1=311-220LRCT-ND, Temperature Coefficient=100ppm/°C, Tolerance=1%, Voltage Rating=50V, Case/Package=0402, Category=Resistors, Checked=?, ComponentLink1Description="Online datasheet", ComponentLink1URL=https://datasheet.ciiva.com/11819/0900766b80c66297-11819466.pdf, Created=D.G, Depth=0.5mm, Features="Moisture Resistant", Height=0.016inch, Lead Free="Lead Free", Length=1mm, Manufacturer Part Number=RC0402FR-07220RL, Military Standard=Not, Number of Pins=2, Number of Terminations=2, Packaging="Tape and Reel", Pricing 1="1=0.10000, 10=0.01400, 100=0.00580, 1000=0.00262, 2500=0.00228, 5000=0.00188 (USD)", Pricing 2="1=0.10000, 10=0.01200, 100=0.00400, 1000=0.00400, 2500=0.00400, 10000=0.00300 (USD)", Pricing 3="1=0.08130, 25=0.01210, 100=0.01120, 250=0.01030, 500=0.00900 (GBP)", REACH SVHC="No SVHC", RoHS=Yes, Stock 1=1286042, Stock 2=324625, Stock 3=18234, Supplier 1=Digi-Key, Supplier 2=Mouser, Supplier 3=Farnell, Supplier Part Number 2=603-RC0402FR-07220RL, Supplier Part Number 3=2147864, Termination=SMD/SMT, Voltage Rating (DC)=50V, Width=0.02inch
R6 R9 R10 R12: "RES SMD 1K OHM 1% 1/16W 0402", Case Code (Imperial)=0402, Case Code (Metric)=1005, Manufacturer=Yageo, Max Operating Temperature=155°C, Min Operating Temperature=-55°C, Power Rating=62.5mW, Resistance=1kR, Resistor Type="Thick Film", Supplier Part Number 1=311-1.00KLRDKR-ND, Temperature Coefficient=100ppm/°C, Tolerance=1%, Voltage Rating=50V, Case/Package=0402, Category=Resistors, Checked=?, ComponentLink2Description="Online datasheet", ComponentLink2URL=https://datasheet.ciiva.com/12666/pyu-rc0402-51-rohs-l-6-r-12666741.pdf, Created=D.G, Depth=0.5mm, Height=0.32mm, Lead Free="Lead Free", Length=1mm, Manufacturer Part Number=RC0402FR-071KL, Military Standard=Not, Number of Pins=2, Packaging="Tape and Reel", Pricing 1="1=0.10000, 10=0.01400, 100=0.00580, 1000=0.00262, 2500=0.00228, 5000=0.00188 (USD)", Pricing 2="1=0.10000, 10=0.01200, 100=0.00400, 1000=0.00400, 2500=0.00400, 10000=0.00300 (USD)", Pricing 3="1=0.08130, 25=0.01210, 100=0.01120, 250=0.01030, 500=0.00900 (GBP)", REACH SVHC=Unknown, RoHS=Yes, Stock 1=37591306, Stock 2=11912978, Stock 3=29900, Supplier 1=Digi-Key, Supplier 2=Mouser, Supplier 3=Farnell, Supplier Part Number 2=603-RC0402FR-071KL, Supplier Part Number 3=2132441, Termination=SMD/SMT, Voltage Rating (DC)=50V, Width=0.5mm
R7 R8 R13 R14 R16 R17 R19 R20: "RES SMD 60.4K OHM 1% 1/16W 0402", Case Code (Imperial)=0402, Case Code (Metric)=1005, Manufacturer=Yageo, Max Operating Temperature=155°C, Max Power Dissipation=63mW, Min Operating Temperature=-55°C, Power Rating=62.5mW, Resistance=60.4kR, Resistor Type="Thick Film", Supplier Part Number 1=311-60.4KLRCT-ND, Temperature Coefficient=100ppm/°C, Tolerance=1%, Voltage Rating=50V, Case/Package=0402, Category="Chip SMD Resistors", ComponentLink1Description="Online datasheet", ComponentLink1URL=https://datasheet.ciiva.com/17068/pyu-rc0402-51-rohs-l-6-r-17068614.pdf, Construction=Rectangular, Contact Plating=Tin,Matte, Depth=0.5mm, Features="Moisture Resistant", Lead Free="Lead Free", Length=1mm, Manufacturer Part Number=RC0402FR-0760K4L, Military Standard=Not, Number of Terminations=2, Packaging="Tape and Reel", Pricing 1="1=0.10000, 10=0.01600, 100=0.00660, 1000=0.00299, 2500=0.00259, 5000=0.00214 (USD)", Pricing 2="10=0.00880, 100=0.00810, 500=0.00740, 2500=0.00510, 5000=0.00420, 10000=0.00360, 50000=0.00240 (GBP)", Pricing 3="10000=0.00300 (GBP)", RoHS=Yes, RoHS Compliant=Yes, Series=RC, Size Code=0402, Stock 1=412197, Stock 2=63870, Stock 3=19800, Supplier 1=Digi-Key, Supplier 2=Farnell, Supplier 3=RSComponents, Supplier Part Number 2=3495651, Supplier Part Number 3=1987844, Termination=SMD/SMT, Voltage Rating (DC)=50V, Width=500um
R21 R22: "RES SMD 5.1K OHM 5% 1/16W 0402", Case Code (Imperial)=0402, Case Code (Metric)=1005, Manufacturer=Yageo, Max Operating Temperature=155°C, Max Power Dissipation=63mW, Min Operating Temperature=-55°C, Power Rating=62.5mW, Resistance=5.1kR, Resistance Tolerance=5%, Resistor Type="Thick Film", Supplier Part Number 1=311-5.1KJRCT-ND, Temperature Coefficient=100ppm/°C, Voltage Rating=50V, Case/Package=0402, Category="Chip SMD Resistors", Checked By=?, ComponentLink2Description="Onnline datasheet", ComponentLink2URL=https://datasheet.ciiva.com/16740/pyu-rc0402-51-rohs-l-6-r-16740925.pdf, Construction=Rectangular, Created By="D. Gakure", Depth=0.5mm, Features="Moisture Resistant", Height=0.35mm, Lead Free="Lead Free", Length=1mm, Manufacturer Part Number=RC0402JR-075K1L, Military Standard=Not, Number of Terminations=2, Packaging="Tape and Reel", Pricing 1="1=0.10000, 10=0.01300, 100=0.00520, 1000=0.00233, 2500=0.00202, 5000=0.00167 (USD)", Pricing 2="1=0.10000, 25=0.01000, 100=0.00400, 250=0.00400, 500=0.00300, 1000=0.00300 (USD)", Pricing 3="1=0.10000, 10=0.01000, 50=0.01000, 100=0.00400, 1000=0.00300, 10000=0.00200 (USD)", Pricing 4="10=0.00910, 100=0.00390, 500=0.00320, 2500=0.00240, 5000=0.00210, 10000=0.00190, 50000=0.00150 (GBP)", Pricing 5="10000=0.00270 (GBP)", REACH SVHC="No SVHC", RoHS=Yes, RoHS Compliant=Yes, Series=RC, Size Code=0402, Stock 1=1270619, Stock 2=1265, Stock 3=100817, Stock 4=68890, Stock 5=1265, Supplier 1=Digi-Key, Supplier 2=Newark, Supplier 3=Mouser, Supplier 4=Farnell, Supplier 5=Farnell, Supplier Part Number 2=68R0016, Supplier Part Number 3=603-RC0402JR-075K1L, Supplier Part Number 4=3495714, Supplier Part Number 5=1799293, Termination=SMD/SMT, Tolerance=5%, Voltage Rating (DC)=50V, Weight=2.3E-05oz, Width=0.5mm
U1: library part NCP114BSN330T1G, "CMOS Low Dropout Regulator (LDO), 300 mA 3.3V, Non-Active Discharge, TSOP5", Case/Package=TSOP, Manufacturer="ON Semiconductor", Max Input Voltage=5.5V, Max Operating Temperature=85°C, Max Output Current=300mA, Min Input Voltage=1.7V, Min Operating Temperature=-40°C, Output Voltage=3.3V, Quiescent Current=50uA, Supplier Part Number 1=NCP114BSN330T1GOSCT-ND, Accuracy=2%, Category="Voltage Regulators - Linear", ComponentLink1Description="Datasheet (online)", ComponentLink1URL=http://www.farnell.com/datasheets/2118270.pdf?src-supplier=Farnell, Lead Free="Lead Free", Manufacturer Part Number=NCP114BSN330T1G, Mount="Surface Mount", Number of Outputs=1, Number of Pins=5, Output Type=Fixed, Polarity=Positive, Pricing 1="1=0.45000, 10=0.33700, 25=0.29440, 100=0.19060, 250=0.15780, 500=0.12624, 1000=0.09679 (USD)", RoHS=Yes, RoHS Compliant=Yes, Stock 1=4067, Supplier 1=Digi-Key, Supplier 2=Mouser, Supplier 3=RSComponents, Supplier Part Number 2=863-NCP114BSN330T1G, Supplier Part Number 3=1263179
U2 U3 U4 U5: "8bit OTP Type IO Controller", Manufacturer=PADAUK, Manufacturer Part Number=PMS150C-U6, Package=SOT-23-6, Supplier Part Number 1=C168658, ComponentLink1Description="Padauk datasheet online", ComponentLink1URL=http://www.padauk.com.tw/upload/doc/PMS15A,PMS150C%20datasheet%20V108_EN_20200724.pdf, Pricing 1="1=0.6, 10=0.0595, 100=0.0449", Stock 1=0, Supplier 1=LCSC, Supplier Order Qty 1=3000
U6 U7 U8 U9: "Analog Switch Single SPST 5-Pin TSSOP T/R", Manufacturer=Nexperia, Supplier Part Number 1=1727-4118-6-ND, Category="Decoders and Multiplexers", ComponentLink1Description="Online datasheet", ComponentLink1URL=https://www.mouser.com/ds/2/302/74LVC1G66-1151275.pdf?src-supplier=Mouser, Manufacturer Part Number=74LVC1G66GW,125, Pricing 1="1=0.41000, 10=0.34000, 25=0.28440, 100=0.18010, 250=0.13900, 500=0.11846, 1000=0.08055 (USD)", Pricing 2="5=0.35500, 10=0.28900, 25=0.24200, 50=0.19900, 100=0.15500, 250=0.12200 (USD)", Pricing 3="50=0.28600, 100=0.11900, 250=0.11500, 500=0.10800, 1000=0.10000 (USD)", Pricing 4="1=0.36000, 10=0.28400, 50=0.28400, 100=0.13700, 1000=0.07600, 10000=0.06500 (USD)", RoHS=Yes, Stock 2=1, Stock 3=1, Stock 4=3, Supplier 1=Digi-Key, Supplier 2=Newark, Supplier 3=RSComponents, Supplier 4=Mouser, Supplier Part Number 2=03P2780, Supplier Part Number 3=0510386, Supplier Part Number 4=771-74LVC1G66GW-G
U10 U11 U12 U13: "POWER LOAD SWITCH, HIGH SIDE, SOT-23-6; Power Load Switch Type:High Side; Input Voltage:6.5V; Current Limit:1.7A; On State Resistance:0.085ohm; Distribution Switch Case Style:SOT-23; No. of Pins:6; Thermal Protection:Yes; On / Enable;RoHS Compliant: Yes", Case/Package=SOT-23, Manufacturer 1="Texas Instruments", Max Input Voltage=6.5V, Max Operating Temperature=85°C, Max Power Dissipation=625mW, Min Input Voltage=2.5V, Min Operating Temperature=-40°C, On-State Resistance=85mR, Output Current=1.5A, Package Quantity=1, Supplier Part Number 1=296-32464-1-ND, Category="Hot Swap Controllers", ComponentLink1Description="Online datasheet", ComponentLink1URL=https://datasheet.ciiva.com/15108/getdatasheetpartid-297517-15108509.pdf, Lead Free="Lead Free", Manufacturer Part Number=TPS2553DBVR, Max Supply Voltage=6.5V, Min Supply Voltage=2.5V, Number of Outputs=1, Number of Pins=6, Packaging="Tape and Reel", Pricing 1="1=1.20000, 10=1.07100, 25=1.01640, 100=0.78050, 250=0.68972, 500=0.65340, 1000=0.50820 (USD)", Radiation Hardening=No, REACH SVHC="No SVHC", RoHS=Yes, Stock 1=14713, Supplier 1=Digi-Key, Supplier 2=Farnell, Supplier 3=Mouser, Supplier Part Number 2=3124082, Supplier Part Number 3=595-TPS2553DBVR, Weight=0.00127oz

## Via types
v1: diameter 0.7, hole 0.35, Top Layer to Bottom Layer, tented both sides, 59 vias
v2: diameter 0.6, hole 0.3, Top Layer to Bottom Layer, tented both sides, 24 vias

## Nets (pads, with @x,y where several pads share a name; then routed paths per layer and width w, separated by ;. In a path a pad name is that pad's centre, name@x,y a point inside that pad or via, vN(x,y) a via of type N, cw(c..) or ccw(c..) an arc to the next point about the centre after c; other vN are vias at no path point)
3V3: C3.2 C4.2 C5.2 C6.2 C7.2 C14.2 C15.2 C19.2 C20.2 D1.2 D6.2 D9.2 D12.2 R6.2 R9.2 R10.2 R12.2 U1.5 U2.5 U3.5 U4.5 U5.5 U6.5 U7.5 U8.5 U9.5 | length 96.7
  Top Layer w0.35: D6.2 -8.1,10.6 -8.05,10.65 -7.9,10.65 -7.25,11.3 R6.2 ; -7.251,11.299 U2.5@-4.824,11.299 ; R9.2 -7.25,2.275 -6.344,2.275 -5.632,2.988 v1(-5.578,2.988) ; U3.5 -4.675,2.875 -4.205,2.875 -4,2.67 -4,1.626 -4.15,1.476 C5.2 ; U2.5 -4.6,11.275 -4.25,10.925 -4.176,10.925 -4,10.749 -4,9.23 C4.2@-3.995,9.225 ; C4.2@-4.125,9.025 -4.05,8.95 -3.974,8.95 -3.361,8.337 -3.323,8.337 -2.662,7.675 -2.637,7.675 -2.562,7.6 C15.2 ; U7.5@-2.559,6.659 -2.559,7.575 0.25,7.575 0.9,8.225 0.9,8.975 1.375,9.45 C20.2@1.375,9.475 ; U7.5 -2.074,6.65 -1.022,5.599 D9.2@-1.022,4.697 ; U6.5 -1.442,15.017 C14.2@-1.425,15 ; D1.2 C14.2@-1.425,15 ; C6.2 4,7.5 4,7.475 4,5.876 4.176,5.7 4.25,5.7 4.65,5.3 5.626,5.3 6.651,4.275 R10.2 7.275,4.314 7.65,4.689 7.65,4.705 7.87,4.925 7.886,4.925 8.45,5.489 8.45,6.125 D12.2 ; C6.2@4.075,7.6 4.075,8.485 3.06,9.5 U9.5 1.45,9.5 1.425,9.475 C20.2 C20.2@1.375,9.475 ; C7.2@4.125,15.615 4.125,14.899 4,14.774 4,13.82 4.295,13.525 4.675,13.525 U5.5 5,13.4 5.125,13.525 5.125,13.545 5.33,13.75 5.889,13.75 v1(5.977,13.838) 6.064,13.925 7.165,13.925 7.5,13.59 7.5,12.4 7.25,12.15 R12.2 ; C7.2 4.125,16.078 3.832,16.37 1.32,16.37 0.75,15.8 0.75,15.017 ; C14.2@-1.425,15 C14.2 0.733,15 0.75,15.017 ; 0.75,15.017 0.75,10.07 0.991,9.829 1.021,9.829 C20.2@1.375,9.475
  Top Layer w0.5: C19.2 1.425,1 1.45,1.025 3.57,1.025 v1(3.59,1.045) ; U1.5 13.2,31 C3.2 v1(13.2,32.791)
  Bottom Layer w0.35: v1(5.977,13.838) 5.977,18.134 7.327,19.484 13.2,25.358 v1(13.2,32.791)
  Bottom Layer w0.5: v1(-5.578,2.988) -1.984,2.988 v1(-1.022,3.95) -1.022,4.004 -0.2,4.826 1.136,4.826 3.59,2.372 3.59,1.075 v1@3.576,1.06
GND: C1.1 C2.1 C3.1 C4.1 C5.1 C6.1 C7.1 C8.1 C9.1 C10.1 C11.1 C12.1 C13.1 C14.1 C15.1 C16.1 C17.1 C18.1 C19.1 C20.1 C21.1 C22.1 D1.1 D2.2 D3.2 D4.2 D5.2 D6.1 D7.2 D8.2 D9.1 D10.2 D11.2 D12.1 D22.2 J1.2 J2.2 J3.2 J4.2 J5.2 J6.2 J7.2 J8.2 J9.1 J9.2 J9.3 J9.4 J9.A12 J9.B12 MH1.1 MH2.1 R8.1 R14.1 R17.1 R20.1 R21.2 R22.2 U1.2 U2.2 U3.2 U4.2 U5.2 U6.3 U7.3 U8.3 U9.3 U10.2 U11.2 U12.2 U13.2 | length 232.1
  Top Layer w0.5: MH2.1@-13.75,35.429 MH2.1 ; C1.1@-7.456,17.4 C1.1 ; J9.A12 J9.A12@-2.6,31.35 ; J6.2@-1.968,27.09 C18.1 ; R21.2 v1(7.4,35.75) R22.2
  Top Layer w0.6: J1.2@-10.871,13.116 J1.2@-10.733,13.116 ; D3.2 -10.117,12.5 J1.2@-10.733,13.116 ; U6.3@-4.8,13.733 -5.966,13.733 -6.224,13.991 -8.989,13.991 -9.255,13.725 D2.2 -10.124,13.725 J1.2@-10.733,13.116 ; U6.3 -3.425,13.717 ; D1.1@-3.425,16.224 -3.425,13.717 ; v1(-3.325,9.525) -3.325,9.552 -3.4,9.627 -3.4,10.998 -3.425,11.023 -3.425,11.4 ; D1.1 -3.325,16.8 -2.476,17.649 -1.743,17.649 -1.15,18.241 ; -3.176,14.342 -1.924,14.342 -1.907,14.325 -1.725,14.325 C14.1 ; v1(-2.58,0.72) -2.599,0.739 -3.144,0.739 C5.1 -3.15,1.399 -3.325,1.574 -3.325,2.605 -2.93,3 U3.2 ; U2.2 -3.3,11.275 -3.425,11.4 ; v1(0.885,1.995) 0.89,2 C19.1 ; D9.1 0.9,4.825 1.424,5.349 U4.2@2.399,5.349 ; C20.1@1.405,10.48 1.618,10.48 1.924,10.175 3.222,10.175 v1(3.232,10.186) ; C19.1@1.495,2 1.795,1.7 3.176,1.7 3.801,2.325 U8.3 ; U4.2 2.851,5.35 3.325,5.824 3.325,7.342 C6.1@3.092,7.575 ; U5.2 3.053,13.4 3.166,13.512 v1(3.193,13.512) 3.193,13.539 3.325,13.672 v1@3.325,14.96 ; v1(2.621,8.062) 2.621,8.054 3.075,7.6 C6.1 ; v1@3.231,10.189 3.231,10.211 3.535,10.516 3.535,10.733 v1(3.554,10.753) ; v1(3.324,14.961) C7.1@3.324,15.363 ; v1@3.589,10.787 U9.3@4.637,10.787 ; U9.3 5.484,10.8 5.68,10.997 v1(5.707,10.997) ; U8.3@4.8,2.354 6.575,2.354 6.648,2.282 v1(6.675,2.282) ; D12.1 6.6,6.325 6.81,6.535 7.261,6.535 8.45,7.724 ; v1(9.073,12.5) D10.2 10.09,12.5 10.706,13.116 J4.2@10.717,13.116 ; v1(9.13,3.893) v1@9.137,3.9 ; v1@9.149,3.983 9.149,3.912 v1@9.137,3.9 ; v1@9.15,3.984 9.15,5.14 9.225,5.215 9.225,6.949 8.45,7.724 ; C10.1 9.176,8.45 8.45,7.724 ; D11.2 10.118,13.715 J4.2@10.717,13.116 ; D7.2 10.093,2.625 J3.2@10.733,3.265 ; J3.2@10.871,3.265 J3.2@10.733,3.265 ; J4.2@10.871,13.116 J4.2@10.717,13.116 ; -3.425,11.4 -3.425,13.717 ; v1@9.137,3.9 D8.2 10.098,3.9 J3.2@10.733,3.265
  Top Layer w0.7: J2.2@-10.871,3.265 J2.2@-10.76,3.265 ; D5.2@-10.044,2.625 -10.444,3.025 -10.52,3.025 J2.2@-10.76,3.265 ; D5.2@-9.775,2.625 -9.353,2.625 -8.975,2.247 -8.975,1.778 -7.913,0.716 v1(-6.072,0.716) ; C8.1 -7.187,9.525 D6.1@-6.262,10.45 ; D6.1@-6.15,10.35 -5.775,9.975 -5.775,9.503 -4.572,8.3 -4.287,8.3 C15.1@-3.587,7.6 ; C15.1@-3.562,7.56 v1(-3.562,6.949) -3.562,5.724 -4.015,5.271 -7.978,5.271 -9.324,3.925 -9.775,3.925 D4.2 -10.012,3.9 -10.407,3.505 -10.52,3.505 J2.2@-10.76,3.265 ; J9.A12@-2.6,31.35 -2.6,30.479 -2.375,30.254 ; 0.879,28.317 1.4,28.837 1.4,29.612 2.7,30.912 2.7,31.45 J9.B12 ; 9.191,30.025 C2.1 U1.2 11.478,30.025 11.75,30.297 ; R20.1@11.044,26.456 11.044,27.09 11.75,27.797 ; C3.1 12.2,30.747 11.75,30.297 ; 13.544,27.456 13.204,27.797 11.75,27.797 ; 11.75,27.797 11.75,30.297
  Top Layer w1: C12.1 -14.091,30.491 U10.2 -14.05,30.5 -13.071,30.5 -12.45,31.121 -12.45,33.021 v1(-12.286,33.185) ; C16.1 -9.502,25.873 U11.2 ; U11.2@-8.35,25.898 -7.348,25.898 -6.762,26.483 ; C1.1 -6.035,17.4 -3.66,19.775 v1(-1.15,19.775) ; v1(-6.902,31.449) -7.475,30.876 -7.475,28.948 C13.1 ; v1@-6.872,31.478 J9.4@-4.27,31.478 ; C13.1@-6.762,28.01 -6.762,26.751 ; J9.4 -4.32,31.55 J9.4@-4.248,31.478 ; J6.2@-2.033,27.068 -2.059,27.042 -2.059,26.726 -2.474,26.311 -2.474,24.57 -1.15,23.247 v1(-1.15,19.775) ; J6.2@-2.033,27.115 J6.2@-1.932,27.115 ; J6.2@-1.968,27.09 -1.95,27.107 -0.393,27.107 U12.2 0.359,27.125 0.879,27.646 0.879,28.317 ; -1.15,18.241 v1(-1.15,19.775) ; J9.B12@3.011,31.575 4.245,31.575 J9.1 4.32,29.385 ; R17.1 3.575,28.64 4.32,29.385 ; C22.1@5.918,25.35 5.993,25.425 7.075,25.425 U13.2 7.834,25.45 8.342,25.958 8.342,27.217 C21.1 8.7,27.875 8.7,29.534 9.191,30.025 4.96,30.025 4.684,29.75 4.32,29.385 ; MH1.1@13.75,35.062 MH1.1 ; -6.762,26.483 -6.762,26.751 ; -6.762,26.483 -6.762,26.751
  Top Layer w1.4: v1(6.15,35.75) 6.233,35.833 8.542,35.833 v1(8.625,35.75)
  Top Layer w1.5: J9.4@-4.275,31.605 J9.A12@-2.855,31.605
  Bottom Layer w0.7: v1(-3.562,6.949) -3.562,9.288 v1(-3.325,9.525)
  Bottom Layer w1: v1(-6.072,0.716) -6.07,0.718 -2.582,0.718 v1(-2.58,0.72) -2.56,0.7 -0.129,0.7 0.456,1.286 0.456,1.41 0.885,1.839 0.885,3.825 v1(0.893,3.832) ; v1(-1.15,19.775) 3.324,15.301 3.324,14.302 3.193,14.171 3.193,11.213 3.604,10.802 3.231,10.429 v1@3.231,10.189 ; v1(2.621,8.062) 2.621,9.574 v1(3.232,10.186) ; v1(5.707,10.997) 7.282,12.571 v1@9.073,12.571 ; v1(6.675,2.282) 6.729,2.282 7.503,1.508 8.332,1.508 v1(8.401,1.577) 9.13,2.306 v1(9.13,3.893)
  Bottom Layer w1.4: MH2.1 -13.75,35.278 -13.027,34.555 -13.027,34.143 -12.207,33.323 -11.143,33.323 -9.47,31.65 J9.4 J9.3 J9.2 J9.1 ; J9.2@4.47,35.493 13.532,35.493 MH1.1
  other v1: -0.65,19.125 -6,31.525
  other v2: -13.746,3.265 13.746,3.265 -13.746,13.116 13.746,13.116
JD1_DATA: D2.1 FB1.1 J1.1 MH3.1 U6.1 | length 15.7
  Top Layer w0.2: MH3.1 -11.804,20.711 -9.754,18.662 -9.754,16.129 -8.642,15.017 -8.435,15.225 -8.149,15.225 -8.133,15.241 -5.123,15.241 -4.9,15.017 U6.1 ; J1.1@-10.871,14.386 -10.866,14.381 -9.831,14.381 D2.1 -9.775,14.425 -9.65,14.425 -9.349,14.726 -8.949,14.726 -8.65,15.025 FB1.1
JD1_DATA_MCU: D1.3 R1.1 U2.3 | length 10.5
  Top Layer w0.2: R1.1 -5.525,16.45 -3.855,18.12 -2.796,18.12 -2.616,18.3 -2.575,18.3 -2.375,18.5 D1.3 ; U2.3 -2.393,12.232 v2(-2.393,12.788)
  Bottom Layer w0.2: v2(-4.208,17.767) -2.393,15.951 v2(-2.393,12.788)
JD1_LIM: R5.2 U2.6 | length 25.9
  Top Layer w0.2: R5.2 -15.091,27.745 -15.091,27.235 v2(-15.081,27.225) ; U2.6 -4.783,10.308 v2(-4.783,9.893)
  Bottom Layer w0.2: v2@-15.071,27.215 -15.071,26.68 -11.718,23.326 -6.831,23.326 -5.425,21.92 -5.425,16.134 -6.038,15.52 -6.038,11.147 v2(-4.783,9.893)
JD1_PWR: D3.1 D14.1 J1.3 MH4.1 | length 44.5
  Top Layer w0.35: J1.3@-10.871,11.846 -10.869,11.848 -9.94,11.848 -9.802,11.848 D3.1 -9.825,11.825 -9.9,11.825 -9.9,11.685 -9.94,11.645 -9.94,11.017 -9.983,10.974 -9.983,10.727 v1(-10.05,10.66) ; v2(8.15,21.55) 8.575,21.125 13.336,21.125 MH4.1
  Top Layer w0.4: D14.1@-11.375,24.925 -11.375,22.725 -9.175,20.525 v1(-9.175,18.075)
  Bottom Layer w0.4: v2(-11.393,23.894) -6.488,23.894 -5.164,22.571 7.129,22.571 v2(8.15,21.55) ; v1(-10.05,10.66) -9.968,10.66 -9.175,11.453 v1(-9.175,18.075)
JD1_STATUS: D15.1 U2.4 | length 2.3
  Top Layer w0.2: D15.1 -6.585,12.951 -5.726,12.951 -5,12.225 U2.4
JD1_SW_EN: U2.1 U6.4 | length 4.6
  Top Layer w0.2: U6.4 -2.3,13.717 -1.392,12.809 -1.392,11.133 -2.2,10.325 U2.1
JD2_DATA: D4.1 FB2.1 J2.1 U7.1 | length 7.6
  Top Layer w0.2: J2.1@-10.871,4.535 -10.864,4.543 -9.808,4.543 D4.1 -9.8,5.475 -9.35,5.925 -9.15,5.925 -8.95,6.125 -8.42,6.655 -5.308,6.655 -5.302,6.65 U7.1
JD2_DATA_MCU: D6.3 R2.1 U3.3 | length 8.4
  Top Layer w0.2: D6.3 -7.208,8.392 R2.1 -7.202,7.315 -6.685,7.315 v2(-6.679,7.31) ; v2(-3.125,3.943) -3.118,3.95 U3.3
  Bottom Layer w0.2: v2(-6.679,7.31) -6.679,5.594 -5.105,4.02 -3.202,4.02 v2(-3.125,3.943)
JD2_LIM: R11.2 U3.6 | length 26
  Top Layer w0.2: R11.2 -9.47,23.175 -8.942,22.647 -8.709,22.647 v2(-8.633,22.571)
  Bottom Layer w0.2: v2(-8.633,22.571) -7.344,22.571 -5.75,20.976 -5.75,16.268 -6.363,15.655 -6.363,10.947 -7.675,9.635 -7.675,3.864 -5.861,2.05 v2(-5,2.05)
JD2_PWR: D5.1 D18.1 J2.3 | length 23.6
  Top Layer w0.35: J2.3@-10.871,1.995 -10.851,1.975 D5.1 -9.8,1.012 v1(-9.819,0.993)
  Top Layer w0.4: v1(-6.325,19.338) -6.267,19.395 -6.267,19.558 -5.65,20.175 D18.1@-5.65,20.25
  Bottom Layer w0.4: v1(-9.819,0.993) -9.787,1.025 -8.9,1.025 -8.4,1.525 -8.4,17.263 v1(-6.325,19.338)
JD2_STATUS: D16.1 U3.4 | length 2.2
  Top Layer w0.2: D16.1 -6.072,3.943 -4.807,3.943 U3.4
JD2_SW_EN: U3.1 U7.4 | length 4.3
  Top Layer w0.2: U7.4 -2.3,5.35 -1.6,4.65 -1.6,2.646 -1.921,2.325 -1.925,2.325 -2.2,2.05 U3.1
JD3_DATA: D7.1 FB3.1 J3.1 U8.1 | length 7.1
  Top Layer w0.2: U8.1 6.35,1.025 7.45,2.125 7.65,2.125 7.85,2.325 7.85,2.408 7.967,2.525 9.175,2.525 9.675,2.025 D7.1@9.844,2.025 ; D7.1 9.86,1.985 10.861,1.985 J3.1@10.871,1.995
JD3_DATA_MCU: D9.3 R3.1 U4.3 | length 5
  Top Layer w0.2: R3.1 -0.8,1.6 -0.8,1.82 -0.295,2.325 -0.25,2.325 -0.05,2.525 -0.05,2.825 0.433,3.308 0.604,3.308 0.654,3.257 1.131,3.257 2,4.126 2,4.2 2.2,4.4 U4.3
JD3_LIM: R15.2 U4.6 | length 21.5
  Top Layer w0.2: R15.2 -0.27,23.8 0.05,23.48 0.05,16.462 -0.097,16.316 v2(-0.097,16.207) ; U4.6 v2(5.226,6.3)
  Bottom Layer w0.2: v2(-0.097,16.207) -0.097,9.702 3.305,6.3 v2(5.226,6.3)
JD3_PWR: D8.1 D20.1 J3.3 | length 20.6
  Top Layer w0.4: v1(10,5.671) 10,5.59 9.85,5.44 D8.1 J3.3@10.856,4.55
  Bottom Layer w0.4: v1(2.472,20.385) 2.522,20.385 4.882,18.024 4.882,9.783 8.994,5.671 v1(10,5.671)
JD3_STATUS: D17.1 U4.4 | length 2.4
  Top Layer w0.2: U4.4 5.583,4.4 6.418,3.565 6.45,3.565 D17.1
JD3_SW_EN: U4.1 U8.4 | length 7.2
  Top Layer w0.2: v2(1.657,6.773) 1.727,6.773 2.2,6.3 U4.1 ; U8.4 2.65,2.425 3.065,2.425 3.939,3.299 3.939,3.692 v2(3.966,3.72)
  Bottom Layer w0.2: v2(1.657,6.773) 1.657,6.029 v2(3.966,3.72)
JD4_DATA: D10.1 FB4.1 J4.1 U9.1 | length 7.2
  Top Layer w0.2: U9.1 5.354,9.5 5.81,9.956 7.631,9.956 8.525,10.85 8.725,10.85 8.925,11.05 8.925,11.088 9.687,11.85 D10.1 9.814,11.848 10.869,11.848 J4.1@10.871,11.846
JD4_DATA_MCU: D12.3 R4.1 U5.3 | length 8.1
  Top Layer w0.2: U5.3 2.6,12.45 3.35,11.7 5.95,11.7 6.559,11.091 v2(6.559,10.481) ; v2@6.919,8.931 6.944,8.931 7.55,8.325 D12.3
  Bottom Layer w0.2: v2(6.559,10.481) 6.559,10.373 6.896,10.036 v2(6.896,8.915)
JD4_LIM: R18.2 U5.6 | length 9.2
  Top Layer w0.2: U5.6 5,14.35 6.3,15.65 6.3,22.35 6.15,22.5 6.15,22.525 6,22.675 R18.2
JD4_PWR: D11.1 D21.1 J4.3 | length 7.5
  Top Layer w0.4: D21.1@9.975,19.95 9.975,19.875 9.175,19.075 9.175,14.617 9.427,14.365 10.85,14.365 J4.3@10.871,14.386
JD4_STATUS: D19.1 U5.4 | length 2.2
  Top Layer w0.2: U5.4 5,12.45 5.275,12.725 5.958,12.725 6.167,12.934 6.568,12.934 D19.1
JD4_SW_EN: U5.1 U9.4 | length 4.7
  Top Layer w0.2: U5.1 2.2,14.35 1.4,13.55 1.4,11.7 2.3,10.8 U9.4
JD_DATA_SW: U6.2 U7.2 U8.2 U9.2 | length 35.2
  Top Layer w0.2: v2(-5.525,6.13) -5.46,6.065 -4.715,6.065 U7.2 ; v2(-5.513,14.716) -5.404,14.716 -5.156,14.467 -4.75,14.467 U6.2 ; U8.2 4.673,1.652 5.392,1.652 v2(5.415,1.629) ; U9.2 4.4,10.15 4.175,9.925 4.107,9.925 3.975,9.793 3.975,9.207 4.292,8.89 4.878,8.89 v2(4.892,8.875)
  Bottom Layer w0.2: v2(-5.525,6.13) 0.503,6.13 4.985,1.648 5.396,1.648 v2(5.415,1.629) ; v2(-5.513,14.716) -5.464,14.716 -5.064,14.316 -4.367,14.316 -4.2,14.149 -4.2,6.157 ; v2(4.892,8.875) 5.751,8.016 5.751,2.074 5.415,1.738 v2@5.415,1.724
NetC1_2: C1.2 FB1.2 R1.2 | length 2
  Top Layer w0.2: FB1.2 -7.475,16.425 C1.2 -7.425,16.425 R1.2
NetC8_2: C8.2 FB2.2 R2.2 | length 2.3
  Top Layer w0.2: C8.2 -9.225,7.35 FB2.2 -9.222,7.297 -8.232,7.297 R2.2
NetC9_2: C9.2 FB3.2 R3.2 | length 9.2
  Top Layer w0.2: R3.2 0.05,1.425 0.2,1.275 0.227,1.275 1.107,0.395 5.159,0.395 5.289,0.525 7.25,0.525 7.45,0.725 C9.2@8.668,0.725
NetC10_2: C10.2 FB4.2 R4.2 | length 2.2
  Top Layer w0.2: R4.2 8.6,9.425 FB4.2 C10.2
NetC11_2: C11.2 D14.2 U10.6 | length 5.2
  Top Layer w0.35: U10.6 -11.311,31.439 -11.311,31.801 v1@-11.297,31.815 ; C11.2@-11.325,32.65 -11.325,32.614 -11.311,32.6 v1@-11.311,31.965